# Altium PCB Charger.PcbDoc
Units mil, origin at the board's own origin, x right, y up, seen from the top; angles counter-clockwise.
Board outline 3937.01 x 3937.01 mil, 2 copper layers (Top Layer, Bottom Layer); 47 components, 30 nets, 125 pads, 72 vias.
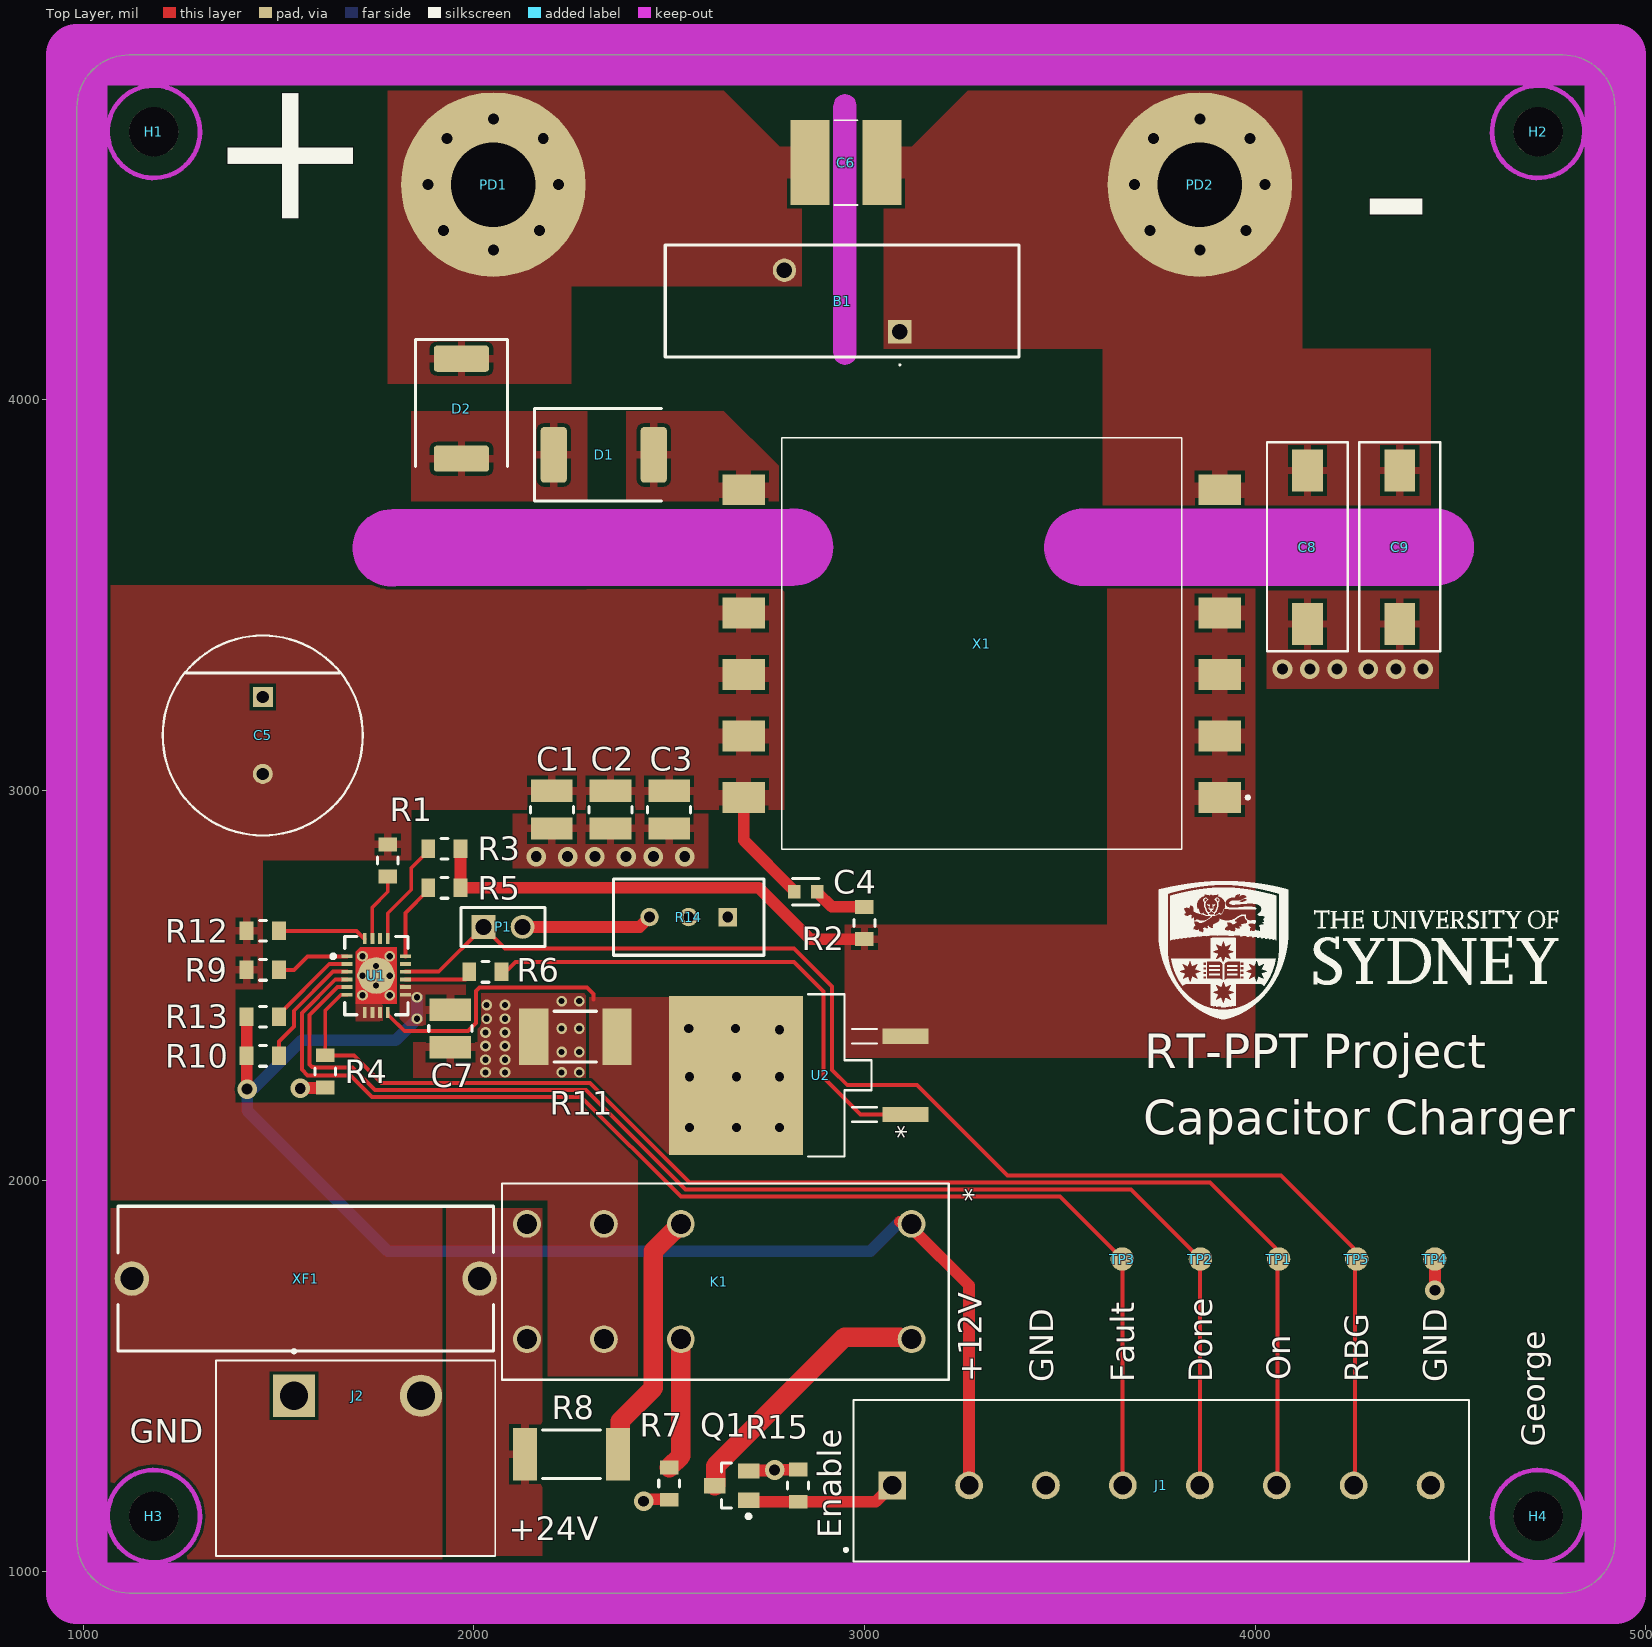
[diagram p0: Top Layer view]
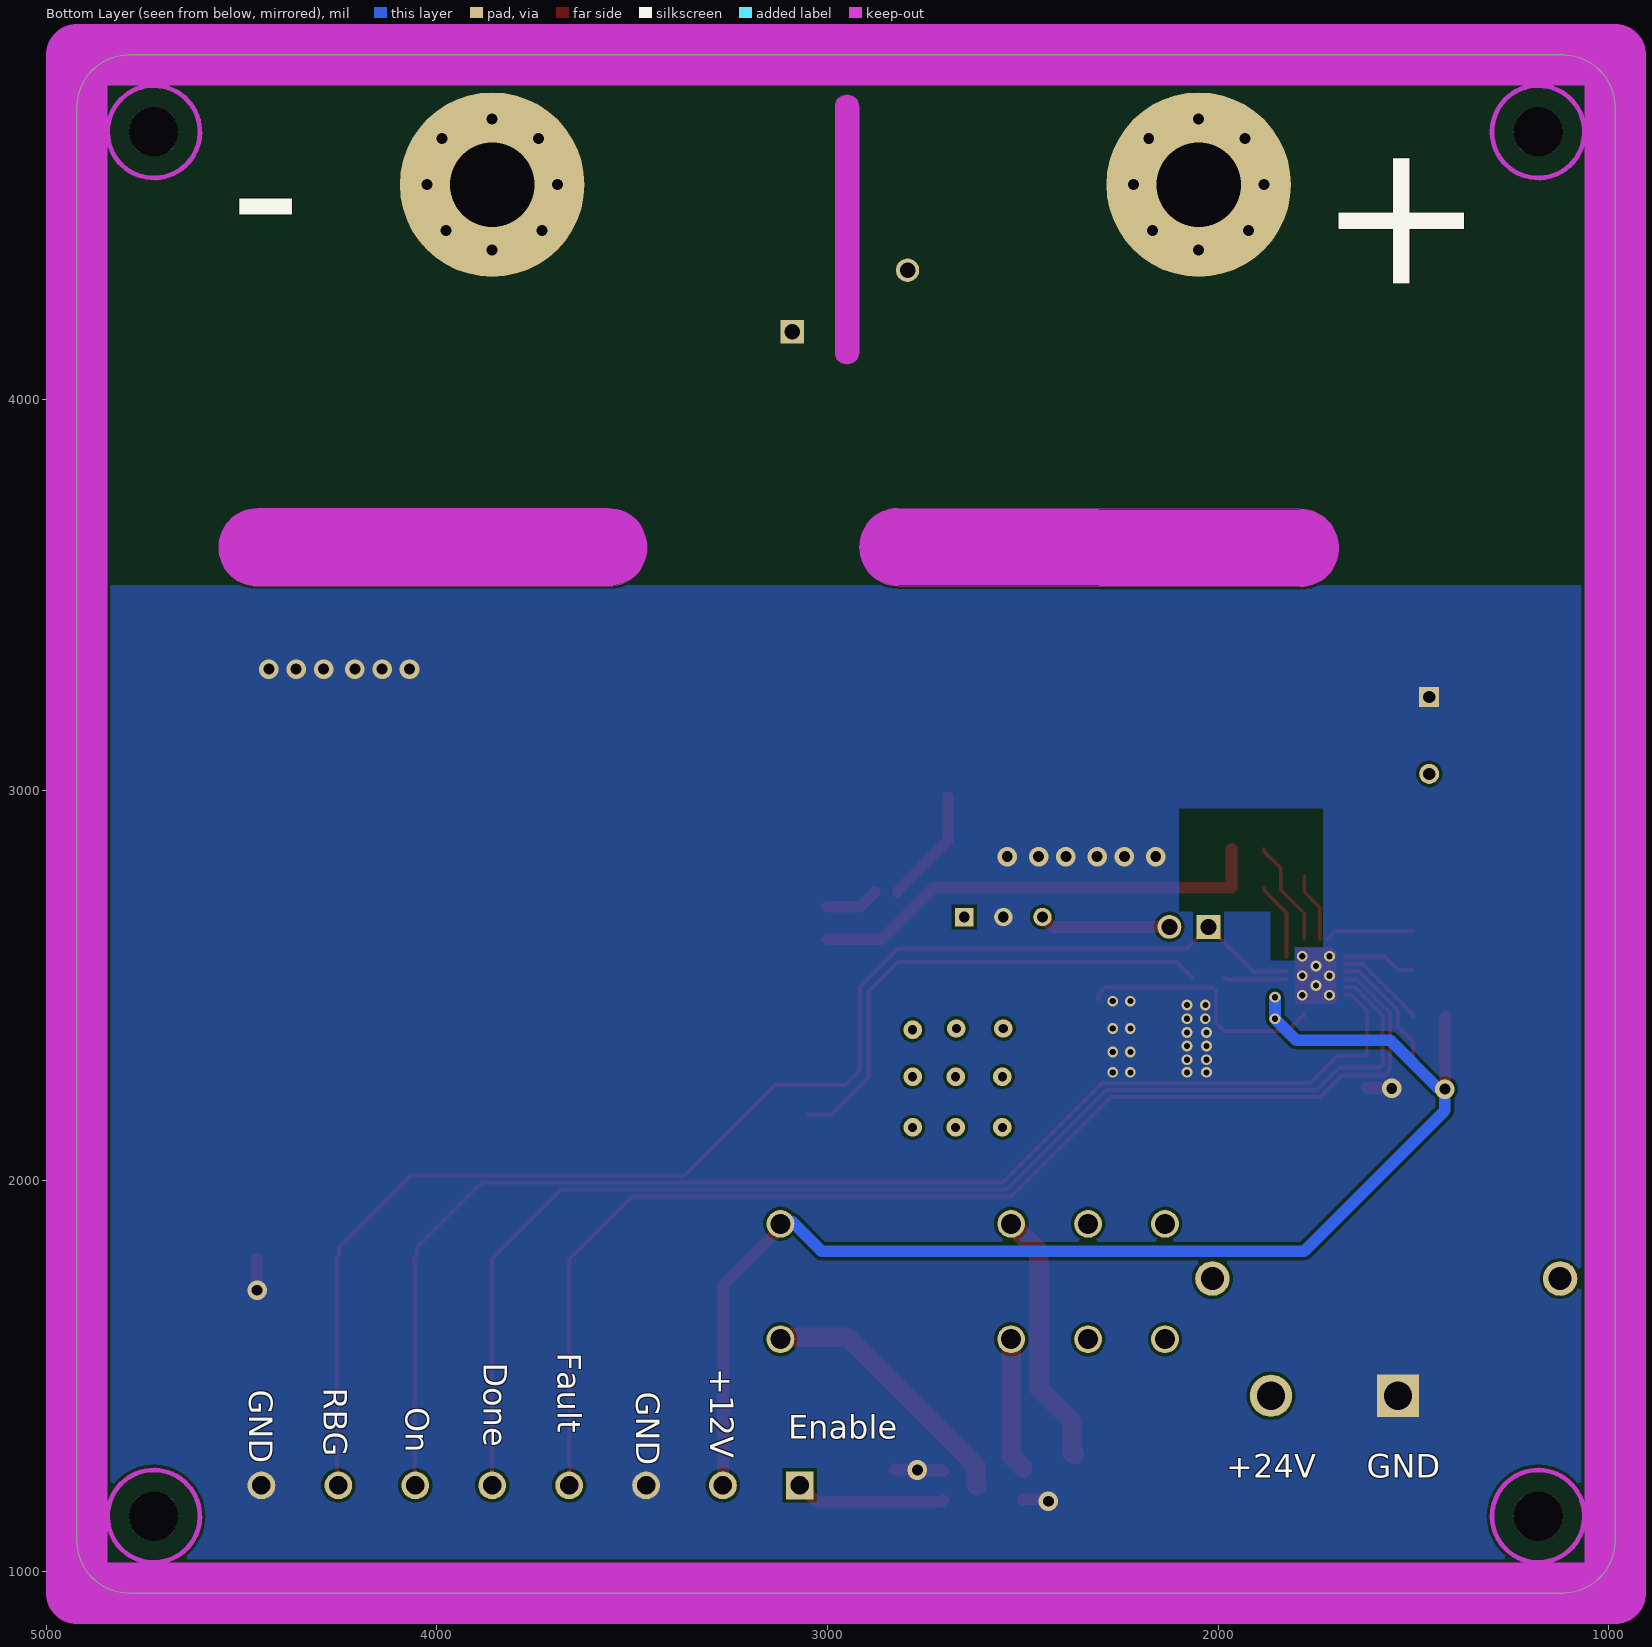
[diagram p1: Bottom Layer view, seen from below]
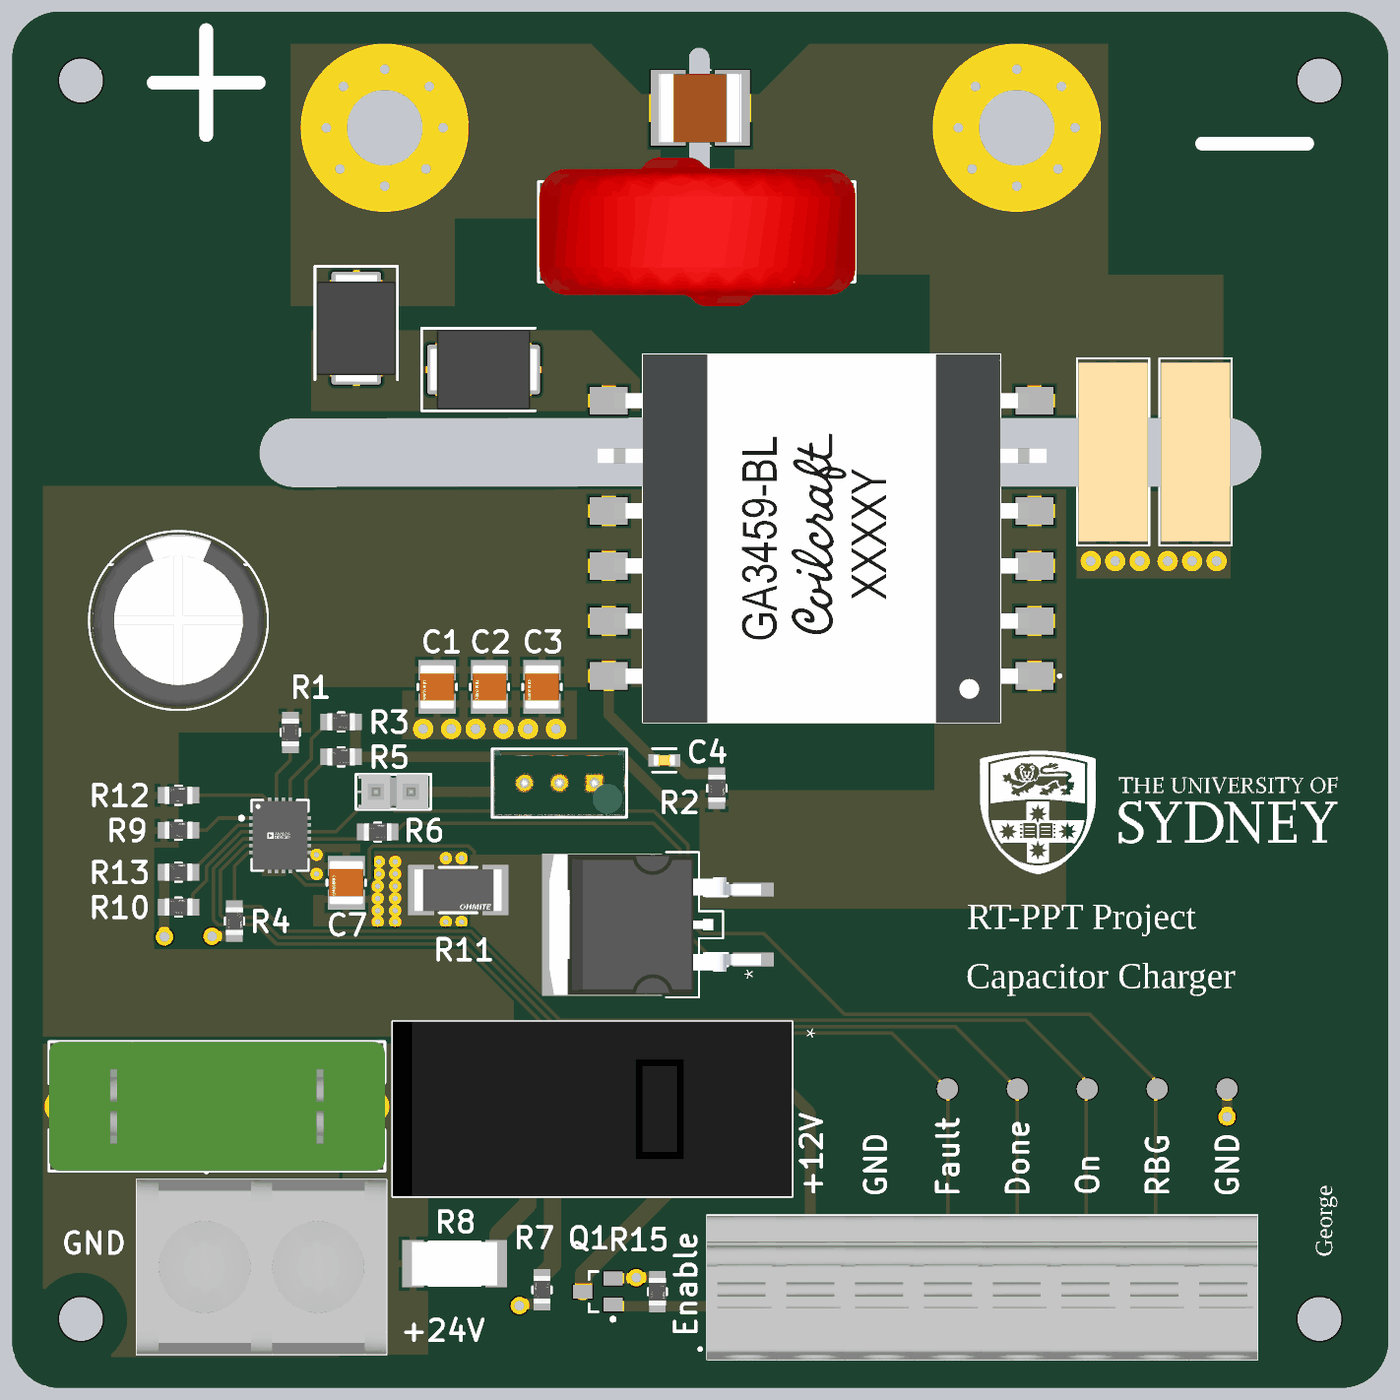
[diagram p2: 3D render of the assembled board from above, using the file's embedded part models]

## Layer stack, top to bottom
Top Solder: solder mask 0.4, Solder Resist, Dk 3.5
Top Layer: signal copper 2.7559
Dielectric 1: dielectric 12.6, FR-4, Dk 4.8
Bottom Layer: signal copper 2.7559
Bottom Solder: solder mask 0.4, Solder Resist, Dk 3.5

## Board outline
984.25,1079.3 984.25,4747.47 cw(c1118.67,4747.47) 1118.67,4881.89 4786.84,4881.89 cw(c4786.84,4747.47) 4921.26,4747.47 4921.26,1079.3 cw(c4786.84,1079.3) 4786.84,944.88 1118.67,944.88 cw(c1118.67,1079.3)
cut-out: 3560,3523.12 cw(c3560,3621.56) 3560,3720 4460,3720 cw(c4460,3621.56) 4558.44,3621.56 cw(c4460,3621.56) 4460,3523.12
cut-out: 1790.2,3521.56 cw(c1790,3620) 1789.8,3718.44 2819.82,3720.54 cw(c2820.02,3622.1) 2918.46,3622.1 cw(c2820.02,3622.1) 2820.22,3523.66
cut-out: 2920.46,4120 ccw(c2950,4120) 2979.54,4120 2979.54,4750 ccw(c2950,4750) 2920.46,4750

## Design rules (kind name [scope] priority, off if disabled: settings)
Clearance [All] p1: gap=8 ignorepadtopadclearanceinfootprint=FALSE except(6: Arc-Text Track-Text SMDPad-Text THPad-Text Via-Text Fill-Text Poly-Text Region-Text Text-Text Text-Hole)
ComponentClearance [All] p1: gap=8 collisioncheckmode=3 verticalgap=8 showdistances=FALSE
DiffPairsRouting [All] p1: maxlimit=10 minlimit=7.87 mostfreqgap=10 toplayer_minwidth=9.84 toplayer_maxwidth=15 toplayer_prefwidth=11.81 bottomlayer_minwidth=9.84 bottomlayer_maxwidth=15 bottomlayer_prefwidth=11.81 maxuncoupledlength=500
Height [All] p1: minheight=0 maxheight=5000 prefheight=500
HoleSize [All] p1: absolutevalues=TRUE maxlimit=236.22 minlimit=11.81 maxpercent=80.000 minpercent=20.000
HoleToHoleClearance [All] p1: gap=8 allowstackedmicrovias=TRUE
MatchedLengths MDI_*_MatchedLengths [InDifferentialPair ('MDI_2') Or InDifferentialPair ('MDI_3') Or InDifferentialPair ('MDI_1') Or InDifferentialPair ('MDI_0')] p1: tolerance=39.37 checknetsindiffpair=FALSE checkdiffpairvsdiffpair=TRUE checkxsignals=TRUE checkothers=TRUE
MatchedLengths TRX0_MatchedLengths [InDifferentialPair ('TRX0')] p2: tolerance=39.37 checknetsindiffpair=FALSE checkdiffpairvsdiffpair=TRUE checkxsignals=TRUE checkothers=TRUE
MatchedLengths SPE_MatchedLengths [InDifferentialPair ('SPE')] p3: tolerance=39.37 checknetsindiffpair=TRUE checkdiffpairvsdiffpair=FALSE checkxsignals=FALSE checkothers=FALSE
MinimumAnnularRing [All] p1: minimumring=5.91
MinimumSolderMaskSliver [All] p1: minsoldermaskwidth=5.91
PolygonConnect [All] p1: thpad.connectstyle=Direct thpad.reliefconductorwidth=10 thpad.reliefentries=4 thpad.polygonreliefangle="90 Angle" thpad.airgapwidth=10 smdpad.connectstyle=Relief smdpad.reliefconductorwidth=20 smdpad.reliefentries=4 smdpad.polygonreliefangle="90 Angle" smdpad.airgapwidth=10 via.connectstyle=Direct via.reliefconductorwidth=10 via.reliefentries=4 via.polygonreliefangle="90 Angle" via.airgapwidth=10
RoutingVias GND/VIN [InNet('GND') Or InNet('VIN')] p1: holewidth=11.81 width=23.62 viastyle="Through Hole" minholewidth=11.81 minwidth=23.62 maxholewidth=11.81 maxwidth=39.37
RoutingVias [All] p2: holewidth=11.81 width=23.62 viastyle="Through Hole" minholewidth=11.81 minwidth=23.62 maxholewidth=11.81 maxwidth=39.37
SilkToSilkClearance [All] p1: silktosilkclearance=8
SilkToSolderMaskClearance Vias [IsVia] p1: minsilkscreentomaskgap=8 clearancetoexposedcopper=TRUE
SilkToSolderMaskClearance Pads [IsPad] p2: minsilkscreentomaskgap=8 clearancetoexposedcopper=TRUE
SolderMaskExpansion [All] p1: expansion=4 istentingtop=FALSE
SupplyNets "Schematic Supply Nets_17" [InNet('+Charge_Power')] p1: voltage=0.000
SupplyNets "Schematic Supply Nets_16" [InNet('PWR+')] p2: voltage=0.000
SupplyNets "Schematic Supply Nets_3" [InNet('+24V')] p3: voltage=0.000
SupplyNets "Schematic Supply Nets_1" [InNet('PWR_GND')] p4: voltage=0.000
SupplyNets "Schematic Supply Nets" [InNet('+12V')] p5: voltage=0.000
SupplyNets "Schematic Supply Nets_2" [InNet('GND')] p6: voltage=0.000
UnRoutedNet [All] p1: checkbadconnections=TRUE
Width [All] p1: maxlimit=50 minlimit=8 preferedwidth=8
21 further rules are at their usual default settings.

## Components (designator, comment, footprint, x,y, rotation, side; value= is the part's Value field where it differs from the comment)
B1 "V420LA40BP" V420LA40BP 3090.55,4173.23 r180 top
C1 "CL32B106KBJNNNE" FP-CL32-IPC_C 2200,2950 r270 top
C2 "CL32B106KBJNNNE" FP-CL32-IPC_C 2350,2950 r270 top
C3 "CL32B106KBJNNNE" FP-CL32-IPC_C 2500,2950 r270 top
C4 "CC0603KRX7R9BB104" FP-CC0603-DA-MFG 2850,2740 r0 top value="100 nF"
C5 "ECA1HM102" FP-RAD-TH-D_12_5_0_5-L_25-MFG 1460,3140 r270 top
C6 "CKG57NX7R2J474M500JH" CAPC6050X550N 2952.76,4606.3 r180 top value=0.47uF
C7 "CL32B106KBJNNNE" FP-CL32-IPC_C 1940,2390 r270 top
C8 "B32021A3472M189" "CAP_5.0 X 11.0 X 13.0_EPC" 4133.86,3425.2 r90 top
C9 "B32021A3472M189" "CAP_5.0 X 11.0 X 13.0_EPC" 4370.08,3425.2 r90 top
D1 "US3M" DO-214AB_SMC 2332.68,3858.27 r0 top
D2 "US3M" DO-214AB_SMC 1968.5,3976.38 r270 top
H1 "M3_Hole" M3_HOLE 1181.1,4685.04 r0 top
H2 "M3_Hole" M3_HOLE 4724.41,4685.04 r0 top
H3 "M3_Hole" M3_HOLE 1181.1,1141.73 r0 top
H4 "M3_Hole" M3_HOLE 4724.41,1141.73 r0 top
J1 "1792928" PHOENIX_1792928 2972.44,1025.59 r0 top
J2 "4DB-P108-02" TE_2-1437667-4 1540,1450 r0 top
K1 "G2RL-1-E-HA DC12" "RELAY_G2RL-1-E DC5_OMR" 2167.8,1594.72 r270 top
P1 "TSW-102-26-F-S" SMTC-TSW-102-26-XX-S 2025,2650 r0 top
PD1 "M5_Pad" M5_PAD 2050,4550 r0 top
PD2 "M5_Pad" M5_PAD 3858.27,4550 r0 top
Q1 "BSS123" FAIR-SOT23-3_V 2660,1220 r90 top
R1 "RT0805BRE0740K2L" FP-RT0805-MFG 1780,2820 r90 top value=40.2KΩ
R2 "RT0805FRE07100RL" FP-RT0805-MFG 3000,2660 r270 top value=100Ω
R3 "RT0805BRE0718K2L" FP-RT0805-MFG 1925,2850 r0 top value=18.2KΩ
R4 "RT0805FRE0710KL" FP-RT0805-MFG 1620,2280 r270 top value=10KΩ
R5 "RT0805BRE0740K2L" FP-RT0805-MFG 1925,2750 r0 top value=40.2KΩ
R6 "RT0805FRE07100RL" FP-RT0805-MFG 2030,2535 r0 top value=100Ω
R7 "RT0805FRE0710KL" FP-RT0805-MFG 2500,1225 r90 top value=10KΩ
R8 "CRCW25121K00JNEG" FP-CRCW2512-e3-IPC_A 2250,1300 r0 top
R9 "RT0805BRE07240KL" FP-RT0805-MFG 1460,2540 r0 top value=240KΩ
R10 "RT0805FRE07560KL" FP-RT0805-MFG 1460,2320 r0 top value=560KΩ
R11 "PCS2512DR0100ET" FP-PCS2512-MFG 2260,2369 r0 top value=10mΩ
R12 "RT0805FRE07330KL" FP-RT0805-MFG 1460,2640 r0 top value=330KΩ
R13 "RT0805BRE07150KL" FP-RT0805-MFG 1460,2420 r0 top value=150KΩ
R14 "3296W-1-103RLF" FP-3296W-MFG 2550,2675 r90 top
R15 "RT0805FRE0710KL" FP-RT0805-MFG 2830,1220 r270 top value=10KΩ
TP1 "Test Point" TEST_PAD 4060,1800 r0 top
TP2 "Test Point" TEST_PAD 3860,1800 r90 top
TP3 "Test Point" TEST_PAD 3660,1800 r90 top
TP4 "Test Point" TEST_PAD 4460,1800 r90 top
TP5 "Test Point" TEST_PAD 4260,1800 r90 top
U1 "LT3751IUFD#PBF" FP-UFD-20-05-08-1711-MFG 1750.47,2525.51 r0 top
U2 "STB30NF20" D2PAK_STM 2760,2270 r90 top
X1 "GA3459-BL" GA3459BL 3300,3375 r90 top
XF1 "696108003002" 696108003002 1570,1750 r0 top

## Footprints (in the part's own frame and the unit in brackets; to place one, negate y for a bottom-side part, rotate by r counter-clockwise, add the part's x,y. Pads: shape width x height; smd on the part's side, far side on the other; paste and mask are expansions set on the pad)
696108003002 [mm] "FUSEHOLDER BLOCKS - PCB - CLIP COVER - THT"
  round 2.25 hole 1.5: 1(-11.3,0) 2(11.3,0)
  silkscreen extent -12.2,-4.7 12.2,4.7, body extent -12.2,-4.7 12.2,4.7, height 11.55
"CAP_5.0 X 11.0 X 13.0_EPC" [mm]
  rect 2.75x2 smd: 1(0,0) 2(9.982,0)
  silkscreen extent -1.78,-2.63 11.81,2.63, body extent -1.51,-2.5 11.49,2.5, height 15.5
CAPC6050X550N [mm]
  rect 2.53x5.51 smd: 1(-2.336,0) 2(2.336,0)
  silkscreen extent -0.75,-2.75 0.75,2.75, body extent -3,-2.5 3,2.5, height 5.5
D2PAK_STM [mil]
  rect 39x118 smd paste+0 mask+0: 1(-100,-345) 2(100,-345)
  rect 407x343 smd paste+0 mask+0: 3(0,88.5)
  silkscreen extent -208,-272 208,-95, body extent -201,-369 201,239, height 181
DO-214AB_SMC [mm]
  rrect25% 1.7x3.6 smd: A(3.25,0) K(-3.25,0)
  silkscreen extent -4.5,-3 3.75,3, body extent -3.95,-2.9 3.95,2.9, height 2.2
FAIR-SOT23-3_V [mm] "SOT23, 3-Leads, Body 2.92x1.3mm, Pitch 0.95mm"
  rect 1x1.4 smd: 1(-0.95,-1.1) 2(0.95,-1.1) 3(0,1.1)
  silkscreen extent -2.12,-1.23 1.46,0.65, body extent -1.46,-0.65 1.46,0.65, height 1.2
FP-3296W-MFG [mm]
  rect 1.2x1.2 hole 0.7 paste-2539.97 mask+0: 1(0.005,-2.54)
  round 1.2 hole 0.7 paste-2539.97 mask+0: 2(0.005,0) 3(0.005,2.54)
  silkscreen extent -2.48,-4.89 2.48,4.89, body extent -2.58,-4.99 2.58,4.99, height 0.25
FP-CC0603-DA-MFG [mm]
  rect 0.8x0.9 smd paste+0 mask+0: 1(-0.75,0) 2(0.75,0)
  silkscreen extent -0.85,-0.85 0.85,0.85, body extent -1.35,-0.75 1.35,0.75, height 0.25
FP-CL32-IPC_C [mil]
  rect 57.19x106.46 smd paste+0 mask+0: 1(-48.24,0) 2(48.24,0)
  silkscreen extent -8,-55 8,55, body extent -81,-59 81,59, height 10
FP-CRCW2512-e3-IPC_A [mil]
  rect 61.22x134.18 smd paste+0 mask+0: 1(-119.12,0) 2(119.12,0)
  silkscreen extent -74,-62 74,62, body extent -169,-87 169,87, height 10
FP-PCS2512-MFG [mm]
  rect 1.9x3.68 smd paste+0 mask+0: 1(-2.7,0) 2(2.7,0)
  silkscreen extent -1.38,-1.65 1.38,1.65, body extent -3.75,-1.94 3.75,1.94, height 0.25
FP-RAD-TH-D_12_5_0_5-L_25-MFG [mm]
  rect 1.3x1.3 hole 0.8 paste-2539.97 mask+0: 1(-2.5,0)
  round 1.3 hole 0.8 paste-2539.97 mask+0: 2(2.5,0)
  silkscreen extent -6.5,-6.5 6.5,6.5, body extent -6.6,-6.6 6.6,6.6, height 0.25
FP-RT0805-MFG [mm]
  rect 0.9x1.2 smd paste+0 mask+0: 1(-1.05,0) 2(1.05,0)
  silkscreen extent -0.23,-0.67 0.23,0.67, body extent -1.6,-0.77 1.6,0.77, height 0.25
FP-UFD-20-05-08-1711-MFG [mm]
  rect 0.7x0.25 smd paste+0 mask+0: 1(-1.9,1.25) 2(-1.9,0.75) 3(-1.9,0.25) 4(-1.9,-0.25) 5(-1.9,-0.75) 6(-1.9,-1.25) 11(1.9,-1.25) 12(1.9,-0.75) 13(1.9,-0.25) 14(1.9,0.25) 15(1.9,0.75) 16(1.9,1.25)
  rect 0.25x0.7 smd paste+0 mask+0: 7(-0.75,-2.4) 8(-0.25,-2.4) 9(0.25,-2.4) 10(0.75,-2.4) 17(0.75,2.4) 18(0.25,2.4) 19(-0.25,2.4) 20(-0.75,2.4)
  round 2.385 smd paste+0 mask+0: 21(0,0)
  Top Layer region: -1.325,-1.825 1.325,-1.825 1.325,1.825 -1.05,1.825 -1.325,1.55 -1.325,-1.825
  silkscreen extent -2.92,-2.55 2.05,2.55, body extent -2.35,-2.85 2.35,2.85, height 0.25
GA3459BL [mm]
  rect 2x2.75 smd: 1(-10,-15.475) 2(-6,-15.475) 3(-2,-15.475) 4(2,-15.475) 6(10,-15.475) 7(10,15.475) 9(2,15.475) 10(-2,15.475) 11(-6,15.475) 12(-10,15.475)
  silkscreen extent -13.37,-17.4 13.37,13, body extent -13.38,-16.33 13.38,16.33, height 13.6
M3_HOLE [mm]
  round 3.2 hole 3.2 unplated: ""(0,0)
  Keep-Out Layer lines w0.305: 2.999,-0.057 cw(c0,0) 3,0
M5_PAD [mm]
  round 12 hole 5.5: 1(0,0)
PHOENIX_1792928 [mm]
  rect 1.8x1.8 / inner round 1.8 / far side rect 1.8x1.8 hole 1.2: 01(2.5,4.95)
  round 1.8 hole 1.2: 02(7.5,4.95) 03(12.5,4.95) 04(17.5,4.95) 05(22.5,4.95) 06(27.5,4.95) 07(32.5,4.95) 08(37.5,4.95)
  silkscreen extent -0.61,0 40,10.5, body extent 0,-0.05 40,10.45, height 13.6
"RELAY_G2RL-1-E DC5_OMR" [mil]
  round 71 / inner round 60 / far side round 71 hole 51 paste-99999 mask+0: 1(-295.28,952.76) 2(-295.28,362.2) 3(-295.28,165.35) 4(-295.28,-31.5) 5(0,-31.5) 6(0,165.35) 7(0,362.2) 8(0,952.76)
  silkscreen extent -399,-96 103,1048, body extent -398,-94 102,1047, height 618
SMTC-TSW-102-26-XX-S [mm] ".025 SQ Post Terminal Strip Assembly, 1x2 Pins, Vertical, 2.54mm Pitch, Male"
  rect 1.55x1.55 hole 1.02: 1(0,0)
  round 1.55 hole 1.02: 2(2.54,0)
  silkscreen extent -1.46,-1.27 4,1.27, body extent -1.4,-1.27 3.81,1.27, height 8.38
TE_2-1437667-4 [mil]
  rect 108x108 hole 72: 1(0,0)
  round 108 hole 72: 2(325,0)
  silkscreen extent -200,-410 515,118, body extent -200,-409 515,91, height 570
TEST_PAD [mil]
  round 60 smd: 1(0,0)
V420LA40BP [mm]
  rect 1.515x1.515 hole 1.01: 1(0,0)
  round 1.515 hole 1.01: 2(7.5,-4)
  silkscreen extent -7.75,-5.65 15.25,2.2, body extent -7.8,-7.4 15.2,3.4, height 27.97

## Part data
B1: "Littelfuse LA Series Variable Resistor 600pF 100A, Clamping 1060V, Varistor 610  720V", Manufacturer_Name=LITTELFUSE, Mouser Part Number=576-V420LA40BP, Datasheet Link=https://www.littelfuse.com/~/media/electronics/datasheets/varistors/littelfuse_varistor_la_datasheet.pdf.pdf, Geometry.Height=28mm, Manufacturer_Part_Number=V420LA40BP, Mouser Price/Stock=https://www.mouser.co.uk/ProductDetail/Littelfuse/V420LA40BP?qs=%252BvNVc1OwqXLcs1GzcX8aHQ%3D%3D
C1 C2 C3 C7: library part CMP-2000-06110-2, "Cap Ceramic 10uF 50V X7R ±10% SMD 1210 +125°C Embossed T/R", Capacitance=10uF, Case Code (Imperial)=1210, Case Code (Metric)=3225, Dielectric=X7R, Max Operating Temperature=125°C, Min Operating Temperature=-55°C, Package Quantity=1, Tolerance=10%, Voltage=50V, Case/Package=1210, Depth=2.5mm, Height=2.5mm, Lead Free="Lead Free", Length=3.2mm, Material=Ceramic, Mount="Surface Mount", Packaging="Tape and Reel", Radiation Hardening=No, Thickness=0.106inch, Voltage Rating=50V, Voltage Rating (DC)=50V, Width=0.098inch
C4: library part CMP-2100-03601-2, "CAP CER 0.1UF 50V X7R 0603", Capacitance="100 nF", Manufacturer=YAGEO, Package=CC0603-DA, Temperature="-55°C to +125°C", Temperature Characteristic=X7R, Temperature Coefficient=15%, Temperature Range High=+125°C, Temperature Range Low=-55°C, Tolerance=0.1, Voltage="50 V", Automotive=No, Category=Cap, ComponentLink2Description=Datasheet, ComponentLink2URL=http://www.yageo.com/documents/recent/UPY-GPHC_X7R_6.3V-to-50V_18.pdf, Device Class L1="Passive Components", Device Class L2=Capacitors, Device Class L3="Ceramic Capacitors", Digikey Description="CAP CER 0.1UF 50V X7R 0603", Footprint Url=http://www.yageo.com/exep/pages/download/literatures/UPY-C_GEN_24.pdf, Height=0.9mm, Lead Free=Yes, Manufacturer Part Number=CC0603KRX7R9BB104, Material=Ceramic, Mouser Description="Multilayer Ceramic Capacitor, CC Series, 0.1 - F, - 10%, X7R, 50 V, 0603 [1608 Metric]", Octopart=https://octopart.com/cc0603krx7r9bb104-yageo-42244635, RoHS=TRUE, Voltage Rating="50 V"
C5: library part CMP-05427-001975-1, "Aluminum Electrolytic Capacitors (Radial Lead Type) 1000uF ±20% 50V", Capacitance=1mF, Case/Package=Radial, Max Operating Temperature=85°C, Min Operating Temperature=-40°C, Package Quantity=200, Ripple Current=1.05A, Tolerance=20%, Voltage Rating=50V, Construction=RADIAL, Diameter=12.5mm, Dissipation Factor=0.12%, Height=25mm, Height - Seated (Max)=1.063inch, Lead Diameter=0.6mm, Lead Pitch=5mm, Lead/Base Style=Straight, Length=25mm, Life (Hours)=2000Hour, Mount="Through Hole", Packaging=Bulk, Polarity=Polar, Radiation Hardening=No, REACH SVHC="No SVHC", RoHS Compliant=Yes, Series=M, Termination=Radial, Voltage Rating (DC)=50V
C6: "0.47ÂµF Â±20% 630V Ceramic Capacitor X7R Stacked SMD, 2 J-Lead", Package="6050 TDK", Voltage=630V, Availability="In Stock", Check_prices=https://www.snapeda.com/parts/CKG57NX7R2J474M500JH/TDK/view-part/?ref=eda, MF=TDK, MP=CKG57NX7R2J474M500JH, Price=None, Purchase-URL=https://pricing.snapeda.com/search/part/CKG57NX7R2J474M500JH/?ref=eda, SnapEDA_Link=https://www.snapeda.com/parts/CKG57NX7R2J474M500JH/TDK/view-part/?ref=snap
C8 C9: "No Description Available", Capacitance=4.7nF, Manufacturer_Name="TDK Epcos", rating=Y-Rated, Copyright="Copyright (C) 2025 Ultra Librarian. All rights reserved.", Manufacturer_Part_Number=B32021A3472M189
D1 D2: "Rectifier Diode, 1 Phase, 1 Element, 3A, 1000V V(RRM), Silicon, DO-214AB", Forward Voltage=1.7V, Manufacturer=Diotec, Max Operating Temperature=150°C, Max Output current=3A, Min Operating Temperature=-50°C, Non-rep Pk Forward Current-Max=100A, Package Body Material=Plastic, Package Shape=Rectangular, Package Style="SMALL OUTLINEMeter", Peak Reflow Temperature (Cel)=260°C, Rep Pk Reverse Voltage-Max=1kV, Supplier Part Number=637-US3M, Application(s)="GENERAL PURPOSE", Category="Rectifier Diodes", ComponentLink1Description=https://datasheet.ciiva.com:443/pdfs/VipMasterIC/IC/DISE/DISE-S-A0001232619/DISE-S-A0001232619-1.pdf?src-supplier=IHS+Markit, ComponentLink1URL=https://datasheet.ciiva.com:443/pdfs/VipMasterIC/IC/DISE/DISE-S-A0001232619/DISE-S-A0001232619-1.pdf?src-supplier=IHS+Markit, ComponentLink2Description=https://datasheet.octopart.com/US3M-Diotec-datasheet-155920030.pdf?src-supplier=TME, ComponentLink2URL=https://datasheet.octopart.com/US3M-Diotec-datasheet-155920030.pdf?src-supplier=TME, Diode Element Material=SILICON, Diode Type=RECTIFIER, JEDEC-95 Code=DO-214AB, JESD-30 Code=R-PDSO-C2, JESD-609 Code=e3, Manufacturer Part Number=US3M, Moisture Sensitivity Level=1, Number of Elements=1, Number of Phases=1, Pins=2, Pricing="1=0.4, 10=0.317, 50=0.317, 100=0.19, 1000=0.182, 10000=0.13 (USD)", Qualification Status="Not Qualified", Reach SVHC Compliant=No, Reverse Recovery Time-Max=0.075us, RoHS=Yes, RoHS Compliant=Yes, Stock=6011, Supplier=Mouser, Surface Mount=Yes, Terminal Finish=Tin, Terminal Form="C BEND", Terminal Position=DUAL
J1: Package=None, Availability=Unavailable, MP=1792928, Price=None
J2: "Conn; Term Strip; Barrier; 2Pole; 8.26mmPitch; SnglRow; 22-12; Series 4DB; 20A; 150V", Package=None, Availability=Unavailable, MF="TE Connectivity", MP=4DB-P108-02, Price=None, SnapEDA_Link=https://www.snapeda.com/parts/4DB-P108-02/TE%20Connectivity%20AMP%20Connectors/view-part/2743721/?ref=snap, TE_purchase_URL=https://www.te.com/usa-en/product-2-1437667-4.html?te_bu=Cor&te_type=disp&te_campaign=seda_glo_cor-seda-global-disp-prtnr-fy19-seda-model-bom-cta_sma-317_1&elqCampaignId=32493
K1: "No Description Available", Manufacturer_Name=Omron, Copyright="Copyright (C) 2025 Ultra Librarian. All rights reserved.", Manufacturer_Part_Number="G2RL-1-E-HA DC12", RefDes=RefDes, Type=Type
P1: library part CMP-1024-00329-1, "0.025\" SQ Post Header, Through-hole, Vertical, -55 to 125 degC, 2.54 mm Pitch, 2-Pin, Male, RoHS", Manufacturer=Samtec, Temperature Range="-55 to 125 degC", ComponentLink1Description="Manufacturer URL", ComponentLink1URL=http://www.samtec.com, ComponentLink2Description=Datasheet, ComponentLink2URL=http://www.samtec.com/documents/webfiles/pdf/TSW_TH.PDF, ComponentLink3Description="Package Specification", ComponentLink3URL=http://www.samtec.com/documents/webfiles/cpdf/TSW-XXX-XX-XXX-X-XX-XXX-MKT.pdf, DatasheetVersion=F-214, Mounting Technology=Through-hole, Orientation=Vertical, PackageDescription=".025[0.64] SQ. Post Terminal Strip Assembly", PackageReference=TSW-102-26-XX-S, PackageVersion="DM, 8/1988", PartNumber=TSW-102-26-F-S, Pitch="2.54 mm", RoHS=True
Q1: library part CMP-2000-04934-1, "N-Channel Logic Level Enhancement Mode Field Effect Transistor, 1.7 V, -55 to 150 degC, 3-Pin SOT-23, RoHS, Tape and Reel", Manufacturer=Fairchild, Maximum Continuous Drain Current=0.17A, Maximum Drain Source Voltage=100V, Maximum Gate Source Voltage=±20V, Operating Temperature=-55to150degC, Package=3SOT-23, Package Description="3-Pin Small Outline Transistor, Body 2.92 x 1.325 mm, Pitch 0.95 mm", Package Reference=SOT23-3, Package Version="Rev. 12, 03/2016", Category=MOSFET, Channel Mode=Enhancement, Channel Type=N, Datasheet URL=https://www.fairchildsemi.com/datasheets/BS/BSS123.pdf, Datasheet Version=Jun-03, Manufacturer URL=https://www.fairchildsemi.com/, Mounting=SurfaceMount, Package URL=http://www.fairchildsemi.com/dwg/MA/MA03D.pdf, Packaging=Tape&Reel, Rad Hard=No, RDS-on=6000@10VmOhm, Typical Fall Time=2.4ns, Typical Rise Time=9ns, Typical Turn-Off Delay Time=17ns, Typical Turn-On Delay Time=1.7ns
R1 R5: library part CMP-2001-01705-2, "RES SMD 40.2K OHM 0.1% 1/8W 0805", Manufacturer=Yageo, Package=RT0805, Power Rating=0.125W, Resistance=40.2KΩ, Temperature="-55°C to +155°C", Temperature Coefficient="50 ppm/°C", Temperature Range High=+155°C, Temperature Range Low=-55°C, Tolerance=0.0025, Voltage Rating=150V, Automotive=No, Category=Res, ComponentLink2Description=Datasheet, ComponentLink2URL=http://www.yageo.com/documents/recent/PYu-RT_1-to-0.01_RoHS_L_9.pdf, Composition="Thin Film", Device Class L1="Passive Components", Device Class L2=Resistors, Device Class L3="Chip SMD Resistors", Digikey Description="RES SMD 40.2K OHM 0.1% 1/8W 0805", Footprint Url=http://www.yageo.com/exep/pages/download/literatures/PYu-R_Mount_10.pdf, Height=0.6mm, Ipc Land Pattern Name=RESC200125X50, Lead Free=Yes, Manufacturer Part Number=RT0805BRE0740K2L, Octopart=https://octopart.com/rt0805bre0740k2l-yageo-1373674, RoHS=TRUE, Series=RT
R2 R6: library part CMP-03412-013069-1, "RES SMD 100 OHM 1% 1/8W 0805", Manufacturer=Yageo, Package=RT0805, Power Rating=0.125W, Resistance=100Ω, Temperature="-55°C to +155°C", Temperature Coefficient="50 ppm/°C", Temperature Range High=+155°C, Temperature Range Low=-55°C, Tolerance=0.0001, Voltage Rating=150V, Automotive=No, Category=Res, ComponentLink2Description=Datasheet, ComponentLink2URL=http://www.yageo.com/documents/recent/PYu-RT_1-to-0.01_RoHS_L_9.pdf, Composition="Thin Film", Device Class L1="Passive Components", Device Class L2=Resistors, Device Class L3="Chip SMD Resistors", Digikey Description="RES SMD 100 OHM 1% 1/8W 0805", Footprint Url=http://www.yageo.com/exep/pages/download/literatures/PYu-R_Mount_10.pdf, Height=0.6mm, Ipc Land Pattern Name=RESC200125X50, Lead Free=Yes, Manufacturer Part Number=RT0805FRE07100RL, Mouser Description="Thin Film Resistors 100 OHM 1% 50PPM", Octopart=https://octopart.com/rt0805fre07100rl-yageo-39834046, RoHS=TRUE, Series=RT
R3: library part CMP-03412-033419-1, "RES SMD 18.2K OHM 0.1% 1/8W 0805", Manufacturer=Yageo, Package=RT0805, Power Rating=0.125W, Resistance=18.2KΩ, Temperature="-55°C to +155°C", Temperature Coefficient="50 ppm/°C", Temperature Range High=+155°C, Temperature Range Low=-55°C, Tolerance=0.0025, Voltage Rating=150V, Automotive=No, Category=Res, ComponentLink2Description=Datasheet, ComponentLink2URL=http://www.yageo.com/documents/recent/PYu-RT_1-to-0.01_RoHS_L_9.pdf, Composition="Thin Film", Device Class L1="Passive Components", Device Class L2=Resistors, Device Class L3="Chip SMD Resistors", Digikey Description="RES SMD 18.2K OHM 0.1% 1/8W 0805", Footprint Url=http://www.yageo.com/exep/pages/download/literatures/PYu-R_Mount_10.pdf, Height=0.6mm, Ipc Land Pattern Name=RESC200125X50, Lead Free=Yes, Manufacturer Part Number=RT0805BRE0718K2L, Octopart=https://octopart.com/rt0805bre0718k2l-yageo-1165173, RoHS=TRUE, Series=RT
R4 R7 R15: library part CMP-03412-023097-1, "RES 10.0K OHM 1/8W 1% SMD 0805", Manufacturer=Yageo, Package=RT0805, Power Rating=0.125W, Resistance=10KΩ, Temperature="-55°C to +155°C", Temperature Coefficient="50 ppm/°C", Temperature Range High=+155°C, Temperature Range Low=-55°C, Tolerance=0.0001, Voltage Rating=150V, Automotive=No, Category=Res, ComponentLink2Description=Datasheet, ComponentLink2URL=http://www.yageo.com/documents/recent/PYu-RT_1-to-0.01_RoHS_L_9.pdf, Composition="Thin Film", Device Class L1="Passive Components", Device Class L2=Resistors, Device Class L3="Chip SMD Resistors", Digikey Description="RES 10.0K OHM 1/8W 1% SMD 0805", Footprint Url=http://www.yageo.com/exep/pages/download/literatures/PYu-R_Mount_10.pdf, Height=0.6mm, Ipc Land Pattern Name=RESC200125X50, Lead Free=Yes, Manufacturer Part Number=RT0805FRE0710KL, Mouser Description="Thin Film Resistors 1/8W 10K ohm 1% 50ppm", Octopart=https://octopart.com/rt0805fre0710kl-yageo-40301150, RoHS=TRUE, Series=RT
R8: library part CMP-1018-00074-2, "RES Thick Film, 1kΩ, 5%, 1W, 200ppm/°C, 2512", Case Code (Imperial)=2512, Case Code (Metric)=6432, Max Operating Temperature=155°C, Max Power Dissipation=1W, Min Operating Temperature=-55°C, Package Quantity=1, Resistance=1k, Temperature Coefficient=200ppm/°C, Tolerance=5%, Voltage Rating=500V, Case/Package=2512, Composition="Thick Film", Contact Plating=Tin, Depth=3.15mm, Features="Automotive AEC-Q200", Height=0.028inch, Lead Free="Lead Free", Length=6.3mm, Military Standard=Not, Mount="Surface Mount", Number of Pins=2, Number of Terminations=2, Packaging="Tape and Reel", Power Rating=1W, Radiation Hardening=No, Termination=SMD/SMT, Voltage Rating (DC)=500V, Weight=0.001429oz, Width=0.124inch, Working Voltage=500V
R9: library part CMP-2001-01771-2, "RES SMD 240K OHM 0.1% 1/8W 0805", Manufacturer=Yageo, Package=RT0805, Power Rating=0.125W, Resistance=240KΩ, Temperature="-55°C to +155°C", Temperature Coefficient="50 ppm/°C", Temperature Range High=+155°C, Temperature Range Low=-55°C, Tolerance=0.0025, Voltage Rating=150V, Automotive=No, Category=Res, ComponentLink2Description=Datasheet, ComponentLink2URL=http://www.yageo.com/documents/recent/PYu-RT_1-to-0.01_RoHS_L_9.pdf, Composition="Thin Film", Device Class L1="Passive Components", Device Class L2=Resistors, Device Class L3="Chip SMD Resistors", Digikey Description="RES SMD 240K OHM 0.1% 1/8W 0805", Footprint Url=http://www.yageo.com/exep/pages/download/literatures/PYu-R_Mount_10.pdf, Height=0.6mm, Ipc Land Pattern Name=RESC200125X50, Lead Free=Yes, Manufacturer Part Number=RT0805BRE07240KL, Octopart=https://octopart.com/rt0805bre07240kl-yageo-1285131, RoHS=TRUE, Series=RT
R10: library part CMP-03412-005329-1, "RES SMD 560K OHM 1% 1/8W 0805", Manufacturer=Yageo, Package=RT0805, Power Rating=0.125W, Resistance=560KΩ, Temperature="-55°C to +155°C", Temperature Coefficient="50 ppm/°C", Temperature Range High=+155°C, Temperature Range Low=-55°C, Tolerance=0.0001, Voltage Rating=150V, Automotive=No, Category=Res, ComponentLink2Description=Datasheet, ComponentLink2URL=http://www.yageo.com/documents/recent/PYu-RT_1-to-0.01_RoHS_L_9.pdf, Composition="Thin Film", Device Class L1="Passive Components", Device Class L2=Resistors, Device Class L3="Chip SMD Resistors", Digikey Description="RES SMD 560K OHM 1% 1/8W 0805", Footprint Url=http://www.yageo.com/exep/pages/download/literatures/PYu-R_Mount_10.pdf, Height=0.6mm, Ipc Land Pattern Name=RESC200125X50, Lead Free=Yes, Manufacturer Part Number=RT0805FRE07560KL, Octopart=https://octopart.com/rt0805fre07560kl-yageo-40032515, RoHS=TRUE, Series=RT
R11: library part CMP-33361-000001-1, "2W 0.010 OHMS 0.5% 2512", Manufacturer=Ohmite, Package=PCS2512, Power Rating=2W, Resistance=10mΩ, Temperature="-55°C to +170°C", Temperature Coefficient=50ppm/°C, Temperature Range High=+170°C, Temperature Range Low=-55°C, Tolerance=0.%, Automotive=Yes, Automotive Grade="Grade 0", Category=Res, ComponentLink2Description=Datasheet, ComponentLink2URL=https://www.ohmite.com/assets/docs/res_pcs.pdf?r=false, Composition="Metal Film", Device Class L1="Passive Components", Device Class L2=Resistors, Device Class L3="Chip SMD Resistors", Digikey Description="2W 0.010 OHMS 0.5% 2512", Height=0.664mm, Ipc Land Pattern Name=RESC635305X41, Lead Free=Yes, Manufacturer Part Number=PCS2512DR0100ET, Octopart=https://octopart.com/pcs2512dr0100et-ohmite-106082038, RoHS=TRUE, Series=PCS
R12: library part CMP-03412-027604-1, "RES SMD 330K OHM 1% 1/8W 0805", Manufacturer=Yageo, Package=RT0805, Power Rating=0.125W, Resistance=330KΩ, Temperature="-55°C to +155°C", Temperature Coefficient="50 ppm/°C", Temperature Range High=+155°C, Temperature Range Low=-55°C, Tolerance=0.0001, Voltage Rating=150V, Automotive=No, Category=Res, ComponentLink2Description=Datasheet, ComponentLink2URL=http://www.yageo.com/documents/recent/PYu-RT_1-to-0.01_RoHS_L_9.pdf, Composition="Thin Film", Device Class L1="Passive Components", Device Class L2=Resistors, Device Class L3="Chip SMD Resistors", Digikey Description="RES SMD 330K OHM 1% 1/8W 0805", Footprint Url=http://www.yageo.com/exep/pages/download/literatures/PYu-R_Mount_10.pdf, Height=0.6mm, Ipc Land Pattern Name=RESC200125X50, Lead Free=Yes, Manufacturer Part Number=RT0805FRE07330KL, Mouser Description="Thin Film Resistors - SMD 1/8W 330K ohm 1% 50ppm", Octopart=https://octopart.com/rt0805fre07330kl-yageo-39865806, RoHS=TRUE, Series=RT
R13: library part CMP-2001-01597-2, "RES SMD 150K OHM 0.1% 1/8W 0805", Manufacturer=Yageo, Package=RT0805, Power Rating=0.125W, Resistance=150KΩ, Temperature="-55°C to +155°C", Temperature Coefficient="50 ppm/°C", Temperature Range High=+155°C, Temperature Range Low=-55°C, Tolerance=0.0025, Voltage Rating=150V, Automotive=No, Category=Res, ComponentLink2Description=Datasheet, ComponentLink2URL=http://www.yageo.com/documents/recent/PYu-RT_1-to-0.01_RoHS_L_9.pdf, Composition="Thin Film", Device Class L1="Passive Components", Device Class L2=Resistors, Device Class L3="Chip SMD Resistors", Digikey Description="RES SMD 150K OHM 0.1% 1/8W 0805", Footprint Url=http://www.yageo.com/exep/pages/download/literatures/PYu-R_Mount_10.pdf, Height=0.6mm, Ipc Land Pattern Name=RESC200125X50, Lead Free=Yes, Manufacturer Part Number=RT0805BRE07150KL, Octopart=https://octopart.com/rt0805bre07150kl-yageo-1467075, RoHS=TRUE, Series=RT
R14: library part CMP-07234-000024-1, "TRIMMER 10K OHM 0.5W PC PIN TOP", Max Operating Temperature=125°C, Max Power Dissipation=500mW, Min Operating Temperature=-55°C, Package Quantity=1, Resistance=10k, Temperature Coefficient=100ppm/°C, Tolerance=10%, Composition=Cermet, Contact Plating=Tin, Depth=4.83mm, Height=0.395inch, Length=9.53mm, Military Standard=Not, Mount="Through Hole", Number of Turns=25, Packaging="Tape and Reel", Power Rating=500mW, Radiation Hardening=No, REACH SVHC="No SVHC", Taper=Linear, Termination=Pin, Weight=0.03oz, Width=0.19inch
TP1 TP2 TP3 TP4 TP5: "Just a Pad", Color=Orange,White, Flammability Rating="UL94 V-0", Forward Current=3A, Forward Voltage=1.08V, Manufacturer="Keystone Electronics", Manufacturer Part Number=5003, Package Quantity=10, Supplier Part Number=36-5003-ND, Body Material=PBT, Category=Connectors, ComponentLink1Description=https://datasheet.ciiva.com/4598/5000-5004-4598618.pdf?src-supplier=Mouser, ComponentLink1URL=https://datasheet.ciiva.com/4598/5000-5004-4598618.pdf?src-supplier=Mouser, ComponentLink2Description=https://datasheet.ciiva.com/16885/70182825-16885788.pdf?src-supplier=Allied+Electronics, ComponentLink2URL=https://datasheet.ciiva.com/16885/70182825-16885788.pdf?src-supplier=Allied+Electronics, ComponentLink3Description=https://datasheet.ciiva.com/1454/1703983-1454826.pdf?src-supplier=Element14, ComponentLink3URL=https://datasheet.ciiva.com/1454/1703983-1454826.pdf?src-supplier=Element14, ComponentLink4Description=https://datasheet.ciiva.com/22631/1703983-22631103.pdf?src-supplier=Element14, ComponentLink4URL=https://datasheet.ciiva.com/22631/1703983-22631103.pdf?src-supplier=Element14, Contact Material=Bronze, Contact Plating=Silver,Tin, Height=0.3inch, Inside Diameter=1.27mm, Lead Free="Lead Free", Length=7.62mm, Material=Nylon,Bronze,Silver, Mounting Technology="PCB,Through Hole", Outside Diameter=2.54mm, Packaging=Bulk, Pins=1, Plating=Silver, Pricing="1=0.39, 10=0.293, 25=0.2624, 100=0.2223, 500=0.18446, 1000=0.1739, 2500=0.1542, 5000=0.14312 (USD)", Radiation Hardening=No, Reach SVHC Compliant=No, RoHS=Yes, RoHS Compliant=Yes, Series=THM, Stock=130387, Supplier=Digikey, Termination="Through Hole", Weight=4.535924g, Width=6.35mm
U1: library part CMP-0491-02187-3, "IC CTRLR CAP CHRGR 4.75V 20-QFN", Case/Package=QFN, Max Operating Temperature=125°C, Max Supply Voltage=24V, Min Operating Temperature=-40°C, Min Supply Voltage=4.75V, Operating Supply Current=5.5mA, Package Quantity=73, Length=5mm, Number of Outputs=1, Number of Pins=20, Packaging=Rail/Tube, REACH SVHC="No SVHC", RoHS Compliant=Yes, Topology=Flyback
U2: "N-channel 200 V, 0.065 Ohm, 30 A, D2PAK STripFET(TM) Power MOSFET", Manufacturer_Name=STMicroelectronics, Copyright="Copyright (C) 2025 Ultra Librarian. All rights reserved.", Datasheet=https://www.st.com/resource/en/datasheet/stp30nf20.pdf, Manufacturer_Part_Number=STB30NF20
X1: "Audio Transformers / Signal Transformers GA3459 for LT3751 500V 20A", Manufacturer_Name=COILCRAFT, Mouser Part Number=994-GA3459-BL, Datasheet Link=https://www.coilcraft.com/pdfs/ga3459.pdf, Geometry.Height=14mm, Manufacturer_Part_Number=GA3459-BL, Mouser Price/Stock=https://www.mouser.co.uk/ProductDetail/Coilcraft/GA3459-BL?qs=ZYnrCdKdyecGrzi6ofbvIw%3D%3D
XF1: Fuse Current=10A, Voltage Rating (AC)=250V, Mount="Through Hole", NexarPartId=56808807, Packaging=Box, REACH SVHC=Unknown, RoHS=Non-Compliant

## Via types
v1: diameter 50, hole 28, Top Layer to Bottom Layer, 33 vias
v2: diameter 27.56, hole 15.75, Top Layer to Bottom Layer, 30 vias
v3: diameter 47.24, hole 23.62, Top Layer to Bottom Layer, 9 vias

## Nets (pads, with @x,y where several pads share a name; then routed paths per layer and width w, separated by ;. In a path a pad name is that pad's centre, name@x,y a point inside that pad or via, vN(x,y) a via of type N, cw(c..) or ccw(c..) an arc to the next point about the centre after c; other vN are vias at no path point)
+12V: C7.1 J1.02 K1.1 R10.1 R13.1 U1.11 U1.12 | length 3412.5
  Top Layer w30: R13.1 R10.1 1419.33,2319.33 1419.33,2235.67 v1(1420,2235) ; K1.1@3090.55,1895.28 3101.65,1895.28 3121.48,1875.44 3124.56,1875.44 3267.72,1732.28 J1.02
  Bottom Layer w30: v2(1855,2470) v2(1855,2415) 1800,2360 1560,2360 1438.83,2238.83 1423.83,2238.83 v1(1420,2235) 1420,2180 1780,1820 3015.28,1820 K1.1@3090.55,1895.28
+24V: J2.2 XF1.1
+Charge_Power: C1.1 C2.1 C3.1 C4.1 C5.2 K1.3 K1.6 R1.2 R9.1 R12.1 X1.9 X1.10 X1.11 X1.12 | length 295
  Top Layer w30: X1.12 2690.75,2871.69 2820.47,2741.97 C4.1
Charge_Done: J1.05 TP2.1 U1.5 | length 3318.5
  Top Layer w10: U1.5 1675.59,2495.91 1651.36,2495.91 1580,2424.54 1580,2297.63 1586.31,2291.31 1590.3,2291.31 1590.99,2290.62 1689.83,2290.62 1747.46,2233 2287.46,2233 2542.46,1978 3682,1978 TP2.1 3859.13,1799.13 3859.13,1221.34 J1.05
Charge_Fault: J1.04 TP3.1 U1.4 | length 3177.2
  Top Layer w10: U1.4 1675.59,2515.59 1645.59,2515.59 1560,2430 1560,2285 1575,2270 1685,2270 1740,2215 2275,2215 2530,1960 3500,1960 TP3.1 3660.71,1799.29 3660.71,1221.18 J1.04
Charge_On: J1.06 R4.1 TP1.1 U1.6 | length 3436.3
  Top Layer w10: U1.6 1660.24,2476.3 1620,2436.06 R4.1 1693.66,2321.34 1764,2251 2297.12,2251 2552.12,1996 3884,1996 4050.43,1829.57 4050.43,1809.57 TP1.1 4057.56,1797.56 4057.56,1222.91 J1.06
GND: C1.2 C2.2 C3.2 C5.1 C7.2 C8.1 C9.1 J1.03 J1.08 J2.1 Q1.2 R4.2 R7.1 R11.1 R14.2 R15.1 TP4.1 U1.7 U1.8 U1.9 U1.21 | length 337.4
  Top Layer w30: v1(1556.01,2236.63) 1557.02,2237.64 1618.98,2237.64 R4.2 ; v1(2435,1180) 2440.41,1180 2445.18,1184.77 2498.89,1184.77 R7.1 ; Q1.2 2704.61,1258.7 2768.7,1258.7 v1(2770,1260) 2778.57,1260 2779.24,1260.67 2826.38,1260.67 R15.1@2826.38,1261.34 ; v1(4460,1720) TP4.1
  other v1: 2160,2830 2240,2830 2310,2830 2390,2830 2460,2830 2540,2830 4070,3310 4140,3310 4210,3310 4290,3310 4360,3310 4430,3310
  other v2: 2030,2277.78 2080,2277.78 2225,2277.78 2270,2277.78 2030,2310 2080,2310 2225,2330 2270,2330 2030,2345 2080,2345 2030,2380 2080,2380 2225,2390 2270,2390 2033.01,2414.94 2080,2415 2033.01,2450 2080,2450 2225,2460 2270,2460 1715,2475 1785,2475 1750,2500 1715,2525 1785,2525 1750,2550 1715,2575 1785,2575
NetC4_2: C4.2 R2.1 | length 137.6
  Top Layer w30: C4.2 2879.53,2738.03 2916.22,2701.34 R2.1
NetD1_A: D1.A X1.7
NetD1_K: D1.K D2.A
NetK1_2: K1.2 R8.2 | length 630.8
  Top Layer w50: R8.2 2374.73,1305.61 2374.73,1384.73 2460,1470 2460,1820 K1.2@2511.71,1871.71
NetK1_4: K1.4 K1.5 R8.1 XF1.2
NetK1_7: K1.7 R7.2 | length 344
  Top Layer w50: R7.2 2530,1296.34 K1.7@2530,1597.87
NetK1_8: K1.8 Q1.3 | length 659.1
  Top Layer w50: Q1.3 2619.25,1222.56 2619.25,1270.09 2949.16,1600 K1.8@3090.55,1600
NetP1_2: P1.2 R14.3 | length 335.4
  Top Layer w30: P1.2 2424.8,2650 R14.3
NetR1_1: R1.1 U1.19 | length 175.7
  Top Layer w10: U1.19@1740.16,2619.49 1740.16,2700.16 1780,2740 R1.1
NetR2_2: R2.2 R3.2 R5.2 U2.2 X1.1 X1.2 X1.3 X1.4 | length 1188.1
  Top Layer w30: R3.2 R5.2 2730,2750 2861.34,2618.66 R2.2
NetR3_1: R3.1 U1.17 | length 273
  Top Layer w10: U1.17 1780,2685 1840,2745 1840,2800.52 1870.86,2831.38 1870.94,2831.38 1883.66,2844.09 R3.1
NetR5_1: R5.1 U1.16 | length 199.5
  Top Layer w10: U1.16 1825.28,2685.71 1883.66,2744.09 R5.1
NetR6_1: R6.1 U1.13 | length 160.3
  Top Layer w10: U1.13@1825.28,2515.35 1979.02,2515.35 R6.1@1983.66,2520
NetR6_2: R6.2 U2.1 | length 1290.5
  Top Layer w10: R6.2@2066.34,2520 2106.34,2560 2820,2560 2895,2485 2895,2265 2990,2170 U2.1@3049.82,2170
NetR9_2: R9.2 U1.1 | length 188.7
  Top Layer w10: R9.2 1540,2540 1574.72,2574.72 U1.1
NetR10_2: R10.2 U1.3 | length 308.5
  Top Layer w10: R10.2 1501.34,2356.34 1540,2395 1540,2435.46 1639.9,2535.35 U1.3
NetR11_2: R11.2 U1.10 U2.3 | length 667.1
  Top Layer w10: U1.10 1780,2422.32 1780.08,2422.24 1783.69,2422.24 1822.58,2383.36 1985.33,2383.36 2006.23,2404.26 2006.23,2486.23 2015,2495 2290,2495 2306.25,2478.75 2306.25,2463.75
  other v3: 2552.37,2136.78 2672.37,2136.78 2782.37,2136.78 2552.37,2266.78 2672.37,2266.78 2782.37,2266.78 2782.37,2386.78 2550,2390 2670,2390
NetR12_2: R12.2 U1.20 | length 227.3
  Top Layer w10: R12.2 1699.65,2640 U1.20@1720.16,2619.49
NetR13_2: R13.2 U1.2 | length 233.6
  Top Layer w10: R13.2 1501.34,2425.91 1630.16,2554.72 U1.2@1675.67,2554.72
Power_Enable: J1.01 Q1.1 R15.2 | length 380.6
  Top Layer w30: Q1.1 2707.24,1178.66 R15.2 ; R15.2@2835.91,1178.66 3029.06,1178.66 J1.01
PWR+: B1.2 C6.2 D2.K PD1.1
  other v1: 2050,4382.68 1922.05,4431.89 2168.11,4431.89 1882.68,4550 2217.32,4550 1931.89,4668.11 2177.95,4668.11 2050,4717.32
PWR_GND: B1.1 C6.1 C8.2 C9.2 PD2.1 X1.6
  other v1: 3858.27,4382.68 3730.31,4431.89 3976.38,4431.89 3690.94,4550 4025.59,4550 3740.16,4668.11 3986.22,4668.11 3858.27,4717.32
RBG: J1.07 P1.1 TP5.1 U1.14 | length 3554.1
  Top Layer w10: U1.14 1910.35,2535.35 P1.1 2080,2595 2819.68,2595 2917,2497.68 2917,2283.86 2955.86,2245 3135,2245 3366,2014 4066,2014 4250.43,1829.57 4250.43,1809.57 TP5.1 4255.98,1795.98 4255.98,1224.49 J1.07
pads on no net: H1. H2. H3. H4. R14.1 U1.15 U1.18

## Polygon pours and split planes (outlines as drawn)
GND on Top Layer "Top Layer-GND" (solid, remove dead copper, pour order 31): 2295,2245 2295,2480 2010,2480 2010,2355 1845,2355 1845,2245
+12V on Top Layer "NONET_L-01_P-001" (solid, remove dead copper, pour order 29): 1810,2504.88 1810,2410 1840,2380 1980,2380 1980,2504.88
+Charge_Power on Top Layer "Top Layer-+Charge_Power" (solid, remove dead copper, pour order 17): 2190,1500 2420,1500 2420,2200 1390,2200 1390,2490 1460,2490 1460,2820 1840,2820 1840,2950 2795.28,2950 2795.28,3525 984.25,3525 984.25,1950 2190,1950
GND on Top Layer "NONET_L-01_P-001" (solid, remove dead copper, pour order 4): 2100,2940 2100,2800 2600,2800 2600,2940
NetD1_A on Top Layer "NONET_L-01_P-001" (solid, remove dead copper, pour order 42): 2780,3740 2780,3830 2640,3970 2390,3970 2390,3740
NetD1_K on Top Layer "NONET_L-01_P-001" (solid, remove dead copper, pour order 41): 1840,3970 1840,3740 2280,3740 2290,3740 2290,3970
PWR_GND on Top Layer "Top Layer-PWR_GND" (solid, remove dead copper, pour order 40): 4120,4130 4448.82,4130 4448.82,3725 3610,3725 3610,4130 3050,4130 3050,4635 3110,4635 3265,4790 4120,4790
PWR+ on Top Layer "Top Layer-PWR+" (solid, remove dead copper, pour order 39): 2250,4290 2840,4290 2840,4635 2795,4635 2640,4790 1780,4790 1780,4040 2250,4040
GND on Top Layer "NONET_L-01_P-001" (solid, remove dead copper, pour order 38): 4030,3510 4030,3260 4470,3260 4470,3510
NetR2_2 on Top Layer "Top Layer-NetR2_2" (solid, remove dead copper, pour order 33): 2950,2315 4000,2315 4000,3525 3622.05,3525 3622.05,2655 2950,2655
+24V on Top Layer "NONET_L-01_P-001" (solid, remove dead copper, pour order 6): 1060,1930 1920,1930 1920,1280 1920,1020 1060,1020
NetR11_2 on Top Layer "NONET_L-01_P-001" (solid, remove dead copper, pour order 15): 2295,2470 2295,2070 2775,2070 2775,2470
NetK1_4 on Top Layer "NONET_L-01_P-001" (solid, remove dead copper, pour order 8): 1930,1930 2175,1930 2175,1040 2040,1040 1930,1040
GND on Top Layer "NONET_L-01_P-001" (solid, remove dead copper, pour order 28): 1698.31,2456.83 1698.31,2408.31 1698,2408 1768,2408 1768,2457.15
GND on Bottom Layer "NONET_L-01_P-001" (solid, remove dead copper, pour order 1): 984.25,3525 3800,3525 4921.26,3525 4921.26,944.88 984.25,944.88

## Keep-outs
Keep-Out Layer:
  lines w59.06: 2950,4120 2950,4750
  lines w157.48: 984.25,944.88 984.25,4881.89 4921.26,4881.89 4921.26,944.88 984.25,944.88
  lines w196.85: 1790,3620 2820.02,3622.1 ; 3560,3622 4460,3622

## Other copper
Bottom Layer:
  pour cut-out: 1732.28,2952.76 2100,2952.76 2100,2690 1865,2690 1865,2597.36 1732.28,2597.36
  pour cut-out: 1865,2600 1865,2565 1805,2565 1805,2600

## Silkscreen, mask and mechanical layers (free items; w line width, h text height)
Top Overlay:
  drawing of 30 lines, arcs and shapes, not listed
  text "+" at 1691.23,4409.37 h393.7 r90
  text "-" at 4269.37,4352.58 h393.7
  text "RT-PPT Project" at 3715.75,2258.48 h150
  text "Capacitor Charger" at 3713.11,2088.37 h150
  text "On" at 4090,1490 h60 r90
  text "+12V" at 3300,1485 h60 r90
  text "GND" at 3483.44,1485.21 h60 r90
  text "Fault" at 3690,1485 h60 r90
  text "Done" at 3890,1485 h60 r90
  text "RBG" at 4290,1485 h60 r90
  text "GND" at 4490,1485 h60 r90
  text "GND" at 1120,1330 h60
  text "George" at 4760.48,1320 h100 r90
  text "Enable" at 2940,1085 h60 r90
  text "+24V" at 2090,1080 h60
Bottom Overlay:
  text "+" at 1691.23,4670.63 h393.7 r90
  text "-" at 4530.63,4352.58 h393.7
  text "Fault" at 3690,1560 h60 r90
  text "Done" at 3880,1535 h60 r90
  text "+12V" at 3300,1520 h60 r90
  text "RBG" at 4290,1470 h60 r90
  text "GND" at 4480,1465 h60 r90
  text "GND" at 3490,1460 h60 r90
  text "On" at 4080,1420 h60 r90
  text "Enable" at 3100,1340 h60
  text "GND" at 1620,1240 h60
  text "+24V" at 1980,1240 h60
Mechanical 1:
  the board outline again, w39.37

## Dimensions
1181.1,4685.04 to 4724.41,4685.04 on Mechanical 1
4724.41,1141.73 to 4724.41,4685.04 on Mechanical 1
4786.84,4881.89 to 4786.84,944.88 on Mechanical 1
984.25,4747.47 to 4921.26,4747.47 on Mechanical 1

## Text inside footprints (layer, text, board x,y; h text height)
K1: Top Overlay "*" at 3230.79,1980.55 h50 r270
U2: Top Overlay "*" at 3130,2107.5 h50 r90